# Altium PCB AMS.PcbDoc (part 3 of 3)
Units mm, origin at the board's own origin, x right, y up, seen from the top; angles counter-clockwise.
Board outline 150 x 60 mm, 4 copper layers (Top Layer, Layer 1, Layer 2, Bottom Layer), stack 0.603 mm thick; 208 components, 140 nets, 599 pads, 192 vias.
Unrouted connection lines stored in the file: 272.
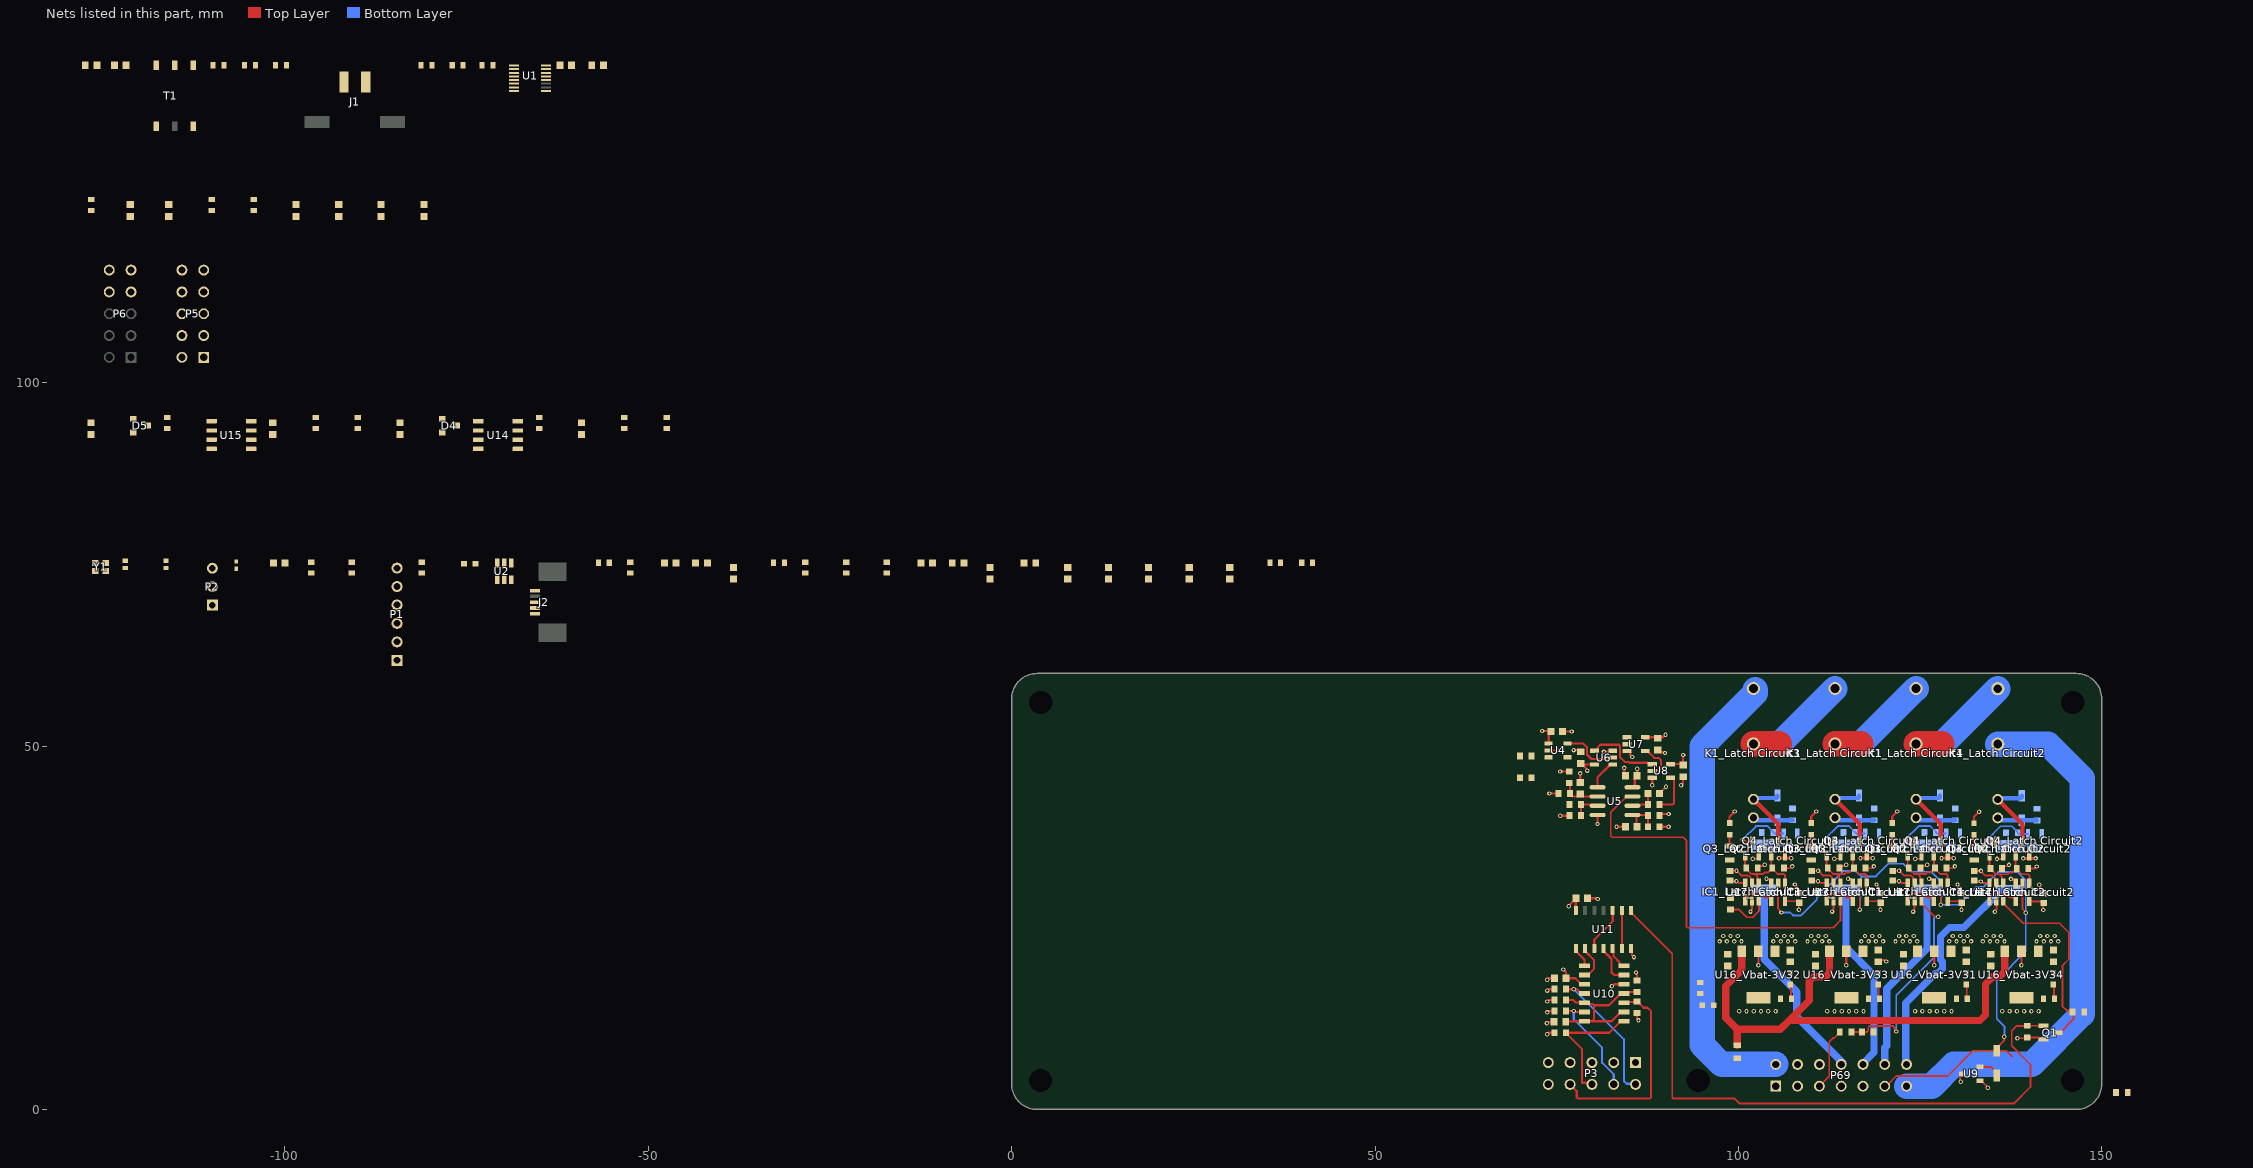
[diagram p3: the nets of this part, all layers, seen from the top]

## Via types
v1: diameter 0.6, hole 0.3, Top Layer to Bottom Layer, 192 vias

## Nets (pads, with @x,y where several pads share a name; then routed paths per layer and width w, separated by ;. In a path a pad name is that pad's centre, name@x,y a point inside that pad or via, vN(x,y) a via of type N, cw(c..) or ccw(c..) an arc to the next point about the centre after c; other vN are vias at no path point) (continued)
NetC28_2: (continued)
  Top Layer w0.3: C28.2@76.25,12.05 76.295,12.095 77.378,12.095 77.423,12.14 79.809,12.14 ; R37.1@76.3,15.05 77.29,15.05 77.625,14.715 78.803,14.715 79.013,14.505 79.974,14.505 80.15,14.329 ; U10.9@84.262,13.41 83.825,13.41 82.665,12.25 82.65,12.25 82.54,12.14 79.809,12.14 ; R38.2@86.05,16.15 84.9,16.15 84.7,15.95 U10.11@84.262,15.95 83.825,15.95 82.204,14.329 80.15,14.329 ; 79.809,12.14 80.15,12.481 80.15,14.329
NetC31_2: C31.2 R39.2
NetC33_2: C33.2 R40.2
NetC39_2: C39.2 R45.2 R46.2
NetC40_2: C40.2 R47.2 R48.2
NetD1_1: D1.1 R18.2
NetD2_1: D2.1 U9.2 | length 3
  Top Layer w0.254: U9.2@133.25,5.855 134.745,5.855 135.55,5.05 D2.1@135.55,4.675
NetD3_1: D3.1 R42.2
NetD6_Vbat-3V31_1: D6_Vbat-3V31.1 R50_Vbat-3V31.2 | length 2
  Top Layer w0.254: D6_Vbat-3V31.1@131.35,17.175 131.425,17.1 131.425,15.325 R50_Vbat-3V31.2@131.5,15.25
NetD6_Vbat-3V32_1: D6_Vbat-3V32.1 R50_Vbat-3V32.2 | length 2
  Top Layer w0.254: D6_Vbat-3V32.1@107.15,17.175 107.225,17.1 107.225,15.325 R50_Vbat-3V32.2@107.3,15.25
NetD6_Vbat-3V33_1: D6_Vbat-3V33.1 R50_Vbat-3V33.2 | length 2
  Top Layer w0.254: D6_Vbat-3V33.1@119.25,17.175 119.325,17.1 119.325,15.325 R50_Vbat-3V33.2@119.4,15.25
NetD6_Vbat-3V34_1: D6_Vbat-3V34.1 R50_Vbat-3V34.2 | length 2
  Top Layer w0.254: D6_Vbat-3V34.1@143.35,17.175 143.425,17.1 143.425,15.325 R50_Vbat-3V34.2@143.5,15.25
"NetD7_Latch Circuit1_1": "D7_Latch Circuit1.1" "K1_Latch Circuit1.A2" "Q2_Latch Circuit1.3" | length 10.9
  Top Layer w0.6: 113.3,42.679 116.7,39.279 116.7,36.849
  Bottom Layer w0.6: 113.3,42.679 113.472,42.851 116.475,42.851 116.6,42.976 116.6,43.199
"NetD7_Latch Circuit1_2": "D7_Latch Circuit1.2" "K1_Latch Circuit1.A1" "R52_Latch Circuit1.1" | length 5.5
  Bottom Layer w0.6: 113.3,40.139 113.544,40.139 113.884,39.799 116.6,39.799 118.7,39.799
"NetD7_Latch Circuit2_1": "D7_Latch Circuit2.1" "K1_Latch Circuit2.A2" "Q2_Latch Circuit2.3" | length 10.9
  Top Layer w0.6: 135.7,42.655 139.1,39.255 139.1,36.825
  Bottom Layer w0.6: 135.7,42.655 135.872,42.827 138.875,42.827 139,42.952 139,43.175
"NetD7_Latch Circuit2_2": "D7_Latch Circuit2.2" "K1_Latch Circuit2.A1" "R52_Latch Circuit2.1" | length 5.5
  Bottom Layer w0.6: 135.7,40.115 135.944,40.115 136.284,39.775 139,39.775 141.1,39.775
"NetD7_Latch Circuit3_1": "D7_Latch Circuit3.1" "K1_Latch Circuit3.A2" "Q2_Latch Circuit3.3" | length 10.9
  Top Layer w0.6: 102.075,42.68 105.475,39.28 105.475,36.85
  Bottom Layer w0.6: 102.075,42.68 102.247,42.852 105.25,42.852 105.375,42.977 105.375,43.2
"NetD7_Latch Circuit3_2": "D7_Latch Circuit3.2" "K1_Latch Circuit3.A1" "R52_Latch Circuit3.1" | length 5.5
  Bottom Layer w0.6: 102.075,40.14 102.319,40.14 102.659,39.8 105.375,39.8 107.475,39.8
"NetD7_Latch Circuit4_1": "D7_Latch Circuit4.1" "K1_Latch Circuit4.A2" "Q2_Latch Circuit4.3" | length 10.9
  Top Layer w0.6: 124.45,42.68 127.85,39.28 127.85,36.85
  Bottom Layer w0.6: 124.45,42.68 124.622,42.852 127.625,42.852 127.75,42.977 127.75,43.2
"NetD7_Latch Circuit4_2": "D7_Latch Circuit4.2" "K1_Latch Circuit4.A1" "R52_Latch Circuit4.1" | length 5.5
  Bottom Layer w0.6: 124.45,40.14 124.694,40.14 125.034,39.8 127.75,39.8 129.85,39.8
"NetD8_Latch Circuit1_1": "D8_Latch Circuit1.1" "Q4_Latch Circuit1.3" "R56_Latch Circuit1.1" | length 5.8
  Top Layer w0.3: 110.025,39.399 110.025,40.299 v1(110.725,40.999)
  Bottom Layer w0.5: 114.8,36.399 118.35,36.399 118.4,36.349 118.4,36.049
"NetD8_Latch Circuit1_2": "D8_Latch Circuit1.2" "R55_Latch Circuit1.1" | length 1.6
  Top Layer w0.3: 110.025,37.799 110.025,36.249 110.05,36.224
"NetD8_Latch Circuit2_1": "D8_Latch Circuit2.1" "Q4_Latch Circuit2.3" "R56_Latch Circuit2.1" | length 5.8
  Top Layer w0.3: 132.425,39.375 132.425,40.275 v1(133.125,40.975)
  Bottom Layer w0.5: 137.2,36.375 140.75,36.375 140.8,36.325 140.8,36.025
"NetD8_Latch Circuit2_2": "D8_Latch Circuit2.2" "R55_Latch Circuit2.1" | length 1.6
  Top Layer w0.3: 132.425,37.775 132.425,36.225 132.45,36.2
"NetD8_Latch Circuit3_1": "D8_Latch Circuit3.1" "Q4_Latch Circuit3.3" "R56_Latch Circuit3.1" | length 5.8
  Top Layer w0.3: 98.8,39.4 98.8,40.3 v1(99.5,41)
  Bottom Layer w0.5: 103.575,36.4 107.125,36.4 107.175,36.35 107.175,36.05
"NetD8_Latch Circuit3_2": "D8_Latch Circuit3.2" "R55_Latch Circuit3.1" | length 1.6
  Top Layer w0.3: 98.8,37.8 98.8,36.25 98.825,36.225
"NetD8_Latch Circuit4_1": "D8_Latch Circuit4.1" "Q4_Latch Circuit4.3" "R56_Latch Circuit4.1" | length 5.8
  Top Layer w0.3: 121.175,39.4 121.175,40.3 v1(121.875,41)
  Bottom Layer w0.5: 125.95,36.4 129.5,36.4 129.55,36.35 129.55,36.05
"NetD8_Latch Circuit4_2": "D8_Latch Circuit4.2" "R55_Latch Circuit4.1" | length 1.6
  Top Layer w0.3: 121.175,37.8 121.175,36.25 121.2,36.225
"NetIC1_Latch Circuit1_1": "IC1_Latch Circuit1.1" "U17_Latch Circuit1.4" | length 4.9
  Top Layer w0.254: 112.15,28.674 112.15,28.974 112.473,29.297 112.473,29.409 112.763,29.699 114.387,29.699 114.939,29.147 115.577,29.147 115.75,28.974 115.75,28.649
"NetIC1_Latch Circuit2_1": "IC1_Latch Circuit2.1" "U17_Latch Circuit2.4" | length 4.9
  Top Layer w0.254: 134.55,28.65 134.55,28.95 134.873,29.273 134.873,29.385 135.163,29.675 136.787,29.675 137.339,29.123 137.977,29.123 138.15,28.95 138.15,28.625
"NetIC1_Latch Circuit3_1": "IC1_Latch Circuit3.1" "U17_Latch Circuit3.4" | length 4.9
  Top Layer w0.254: 100.925,28.675 100.925,28.975 101.248,29.298 101.248,29.41 101.538,29.7 103.162,29.7 103.714,29.148 104.352,29.148 104.525,28.975 104.525,28.65
"NetIC1_Latch Circuit4_1": "IC1_Latch Circuit4.1" "U17_Latch Circuit4.4" | length 4.9
  Top Layer w0.254: 123.3,28.675 123.3,28.975 123.623,29.298 123.623,29.41 123.913,29.7 125.537,29.7 126.089,29.148 126.727,29.148 126.9,28.975 126.9,28.65
NetJ3_4: R40.1
"NetK1_Latch Circuit1_11": "K1_Latch Circuit1.11" "K1_Latch Circuit3.14" | length 13.5
  Top Layer w3.5: 102.075,50.3 105.625,50.3
  Bottom Layer w3.5: 106.273,50.892 113.3,57.919
"NetK1_Latch Circuit2_11": "K1_Latch Circuit2.11" "K1_Latch Circuit4.14" | length 13.5
  Top Layer w3.5: 124.45,50.3 128,50.3
  Bottom Layer w3.5: 128.673,50.868 135.7,57.895
"NetK1_Latch Circuit4_11": "K1_Latch Circuit1.14" "K1_Latch Circuit4.11" | length 13.5
  Top Layer w3.5: 113.3,50.299 116.85,50.299
  Bottom Layer w3.5: 117.423,50.893 124.45,57.92
NetP3_2: P3.2 R35.1 U10.4 | length 20.1
  Top Layer w0.3: R35.1@76.3,16.55 v1(77.347,16.55) 77.8,16.55 78.4,15.95 U10.4@78.838,15.95
  Bottom Layer w0.3: v1(77.347,16.55) 84.25,9.647 84.25,3.926 84.65,3.526 85.774,3.526 P3.2@85.85,3.45
NetP3_4: P3.4 R36.1 U10.6 | length 15
  Top Layer w0.3: R36.1@76.3,13.55 77.318,13.55 77.458,13.41 U10.6@78.838,13.41
  Bottom Layer w0.3: v1(77.347,13.55) 77.347,12.403 81.25,8.5 81.25,6.424 82.85,4.824 P3.4@82.85,3.45
NetP3_6: P3.6 R34.1 U10.8 | length 17.8
  Top Layer w0.3: P3.6@79.85,3.45 79.624,3.676 78.5,3.676 78.5,8.275 76.3,10.475 R34.1@76.3,10.55 82.235,10.55 83.825,12.14 U10.8@84.262,12.14
NetP3_8: P3.8 R33.1 U10.10 | length 28.7
  Top Layer w0.3: P3.8@76.85,3.45 76.85,3.4 77.75,2.5 77.75,1.676 77.926,1.5 87.824,1.5 88,1.676 88,13.5 87.5,14 86.975,14 86.125,14.85 R33.1@86.05,14.85 85.965,14.765 84.347,14.765 U10.10@84.262,14.68
NetP5_1: P5.1 P5.3
"NetQ3_Latch Circuit1_3": "Q3_Latch Circuit1.3" "Q4_Latch Circuit1.1" "R54_Latch Circuit1.1" | length 8.3
  Top Layer w0.254: v1(111.825,37.149) 111.919,37.149 112.219,36.849 113.1,36.849
  Bottom Layer w0.254: v1(111.825,37.149) 113.675,38.999 115.25,38.999 115.43,38.819 115.43,38.794 116.05,38.174 116.05,38.099 116.2,37.949 117.45,37.949
"NetQ3_Latch Circuit2_3": "Q3_Latch Circuit2.3" "Q4_Latch Circuit2.1" "R54_Latch Circuit2.1" | length 8.3
  Top Layer w0.254: v1(134.225,37.125) 134.319,37.125 134.619,36.825 135.5,36.825
  Bottom Layer w0.254: v1(134.225,37.125) 136.075,38.975 137.65,38.975 137.83,38.795 137.83,38.77 138.45,38.15 138.45,38.075 138.6,37.925 139.85,37.925
"NetQ3_Latch Circuit3_3": "Q3_Latch Circuit3.3" "Q4_Latch Circuit3.1" "R54_Latch Circuit3.1" | length 8.3
  Top Layer w0.254: v1(100.6,37.15) 100.694,37.15 100.994,36.85 101.875,36.85
  Bottom Layer w0.254: v1(100.6,37.15) 102.45,39 104.025,39 104.205,38.82 104.205,38.795 104.825,38.175 104.825,38.1 104.975,37.95 106.225,37.95
"NetQ3_Latch Circuit4_3": "Q3_Latch Circuit4.3" "Q4_Latch Circuit4.1" "R54_Latch Circuit4.1" | length 8.3
  Top Layer w0.254: v1(122.975,37.15) 123.069,37.15 123.369,36.85 124.25,36.85
  Bottom Layer w0.254: v1(122.975,37.15) 124.825,39 126.4,39 126.58,38.82 126.58,38.795 127.2,38.175 127.2,38.1 127.35,37.95 128.6,37.95
NetR1_2: R1.2 T1.6
NetR2_1: R2.1 T1.4
NetR3_1: R3.1 R4.2 U1.15
NetR3_2: R3.2 U1.16
NetR5_1: R5.1 R6.2 U1.1
NetR21_2: R21.2 R24.1 U5.3 | length 3.9
  Top Layer w0.3: R21.2@78.35,40.425 R24.1@78.35,41.95 79.584,41.95 79.744,41.79 U5.3@80.625,41.79
NetR25_2: R25.2 U8.4 | length 6
  Top Layer w0.3: R25.2@89.15,41.95 90.974,41.95 91.15,42.126 91.15,43.788 91.125,43.813 91.125,45.475 90.975,45.625 U8.4@90.65,45.625
NetR28_1: "IC1_Latch Circuit4.3" R28.1 R30.2 | length 29.1
  Top Layer w0.254: R28.1@115.55,10.675 R30.2@117,10.675 117.724,10.675 117.873,10.824 117.873,11.285 118.065,11.477 121.298,11.477 121.478,11.297 121.478,11.066 121.725,10.819 v1(121.725,10.725) ; 125.2,28.675 125.2,28.375 126.984,26.591 127.434,26.591 v1(127.5,26.525)
  Bottom Layer w0.254: v1(121.725,10.725) 121.725,15.725 126.9,20.9 126.9,26.325 127.1,26.525 v1(127.5,26.525)
NetU4_5: U4.5 U6.2 | length 7.7
  Top Layer w0.3: U4.5@76.5,50.35 78.67,50.35 79.175,49.845 79.175,48.851 79.801,48.225 82.074,48.225 82.124,48.275 82.55,48.275 U6.2@82.7,48.425
NetU5_1: U5.1 U6.1 | length 4.2
  Top Layer w0.3: U5.1@80.625,44.33 80.625,45.7 82.4,47.475 U6.1@82.7,47.475
NetU6_4: U6.4 U8.1 | length 10.4
  Top Layer w0.3: U6.4@80.2,49.375 80.5,49.375 80.65,49.525 80.65,49.825 81,50.175 83.549,50.175 83.725,49.999 83.725,48.475 84.375,47.825 84.885,47.825 85.01,47.7 87.499,47.7 87.524,47.675 87.675,47.675 87.825,47.525 U8.1@88.15,47.525
NetU7_4: U7.4 U8.2 | length 5.3
  Top Layer w0.3: U7.4@87.175,49.325 87.475,49.325 88.425,48.375 89.025,48.375 89.35,48.05 89.35,46.751 89.174,46.575 U8.2@88.15,46.575
NetU10_1: U10.1 U11.1 | length 2.9
  Top Layer w0.3: U11.1@77.63,22.15 77.63,21.8 78.838,20.592 U10.1@78.838,19.76
NetU10_2: U10.2 U11.2 | length 5
  Top Layer w0.3: U10.2@78.838,18.49 79.275,18.49 80.15,19.365 80.15,20.55 78.9,21.8 U11.2@78.9,22.15
NetU10_13: U10.13 U11.4 | length 5.6
  Top Layer w0.3: U11.4@81.44,22.15 81.44,21.8 82.55,20.69 82.55,18.85 82.91,18.49 U10.13@84.262,18.49
NetU10_14: U10.14 U11.5 | length 3.3
  Top Layer w0.3: U11.5@82.71,22.15 82.835,22.025 82.835,21.075 83.649,20.261 83.649,19.935 83.825,19.76 U10.14@84.262,19.76
NetU11_3: U11.3 U11.10 | length 6.3
  Top Layer w0.3: U11.3@80.17,22.15 80.17,23.37 82.71,25.91 U11.10@82.71,27.4
NetU11_6: U11.6 U11.9 | length 5.2
  Top Layer w0.3: U11.6@83.98,22.15 U11.9@83.98,27.4
NRST: C9.2 P1.5 R16.1
OSC_IN: C12.2 Y1.1
OSC_OUT: R17.2
PDOC-In: Q1.1 R31.2 U11.8 | length 92.1
  Top Layer w0.254: U11.8@85.25,27.4 85.25,27.05 90.9,21.4 90.9,1.649 91.049,1.5 99.5,1.5 100.2,0.8 137.9,0.8 140.2,3.1 140.2,6.162 137.623,8.739 137.623,10.823 138.3,11.5 139.737,11.5 139.762,11.525 Q1.1@141.975,11.525
PDOC-MCU: "IC1_Latch Circuit2.4" "Q2_Latch Circuit2.1" "Q3_Latch Circuit2.1" "R51_Latch Circuit2.2" "R53_Latch Circuit2.2" "U17_Latch Circuit2.1" | length 12.6
  Top Layer w0.254: 134.55,34.925 134.55,33.325 134.7,33.175 134.7,33.1 135.427,32.373 135.9,32.373 ; 136.45,31.15 136.277,31.323 136.277,31.996 135.9,32.373 ; 138.15,34.925 138.15,33.325 138.3,33.175 138.3,33.1 ; 140.05,31.125 140.05,32.223 139.9,32.373 139.027,32.373 138.3,33.1 ; 135.9,32.373 137.049,32.373 137.276,32.6 137.725,32.6 137.952,32.827 138.027,32.827 138.3,33.1
PDOC-Out: "R56_Latch Circuit2.2" P69.14 | length 32.1
  Bottom Layer w1: P69.14@123.15,6.2 123.054,6.296 123.054,6.649 123.025,6.679 123.025,14.65 127.075,18.7 127.426,18.7 128.1,19.374 128.1,20.326 127.825,20.601 127.825,23.801 129.047,25.023 131.023,25.023 136.175,30.175 137.2,30.175
PDOC-Ready: "IC1_Latch Circuit2.3" Q1.3 R32.1 | length 27.3
  Top Layer w0.254: 136.45,28.65 136.45,28.35 139.188,25.612 144.189,25.612 145.5,24.301 145.5,20.7 144.6,19.8 144.6,14.2 145.175,13.625 145.775,13.625 R32.1@146,13.4 146.1,13.3 146.1,12.4 144.275,10.575 Q1.3@143.875,10.575
PRTA_N: J1.2 T1.3
PRTA_P: J1.1 T1.1
RESET: "U17_Latch Circuit1.2" "U17_Latch Circuit2.2" "U17_Latch Circuit3.2" "U17_Latch Circuit4.2" D2.2 P69.11 R?.1 | length 109.7
  Top Layer w0.254: 105.475,31.15 105.475,27.613 105.925,27.163 v1(105.925,27.1) ; v1@116.7,27.612 116.7,31.149 ; P69.11@120.15,3.2 120.35,3.2 121.75,4.6 128.8,4.6 132.275,8.075 D2.2@135.55,8.075 ; v1(127.85,28.175) 127.85,31.15 ; v1(136.6,10) 136.534,9.934 136.534,9.434 135.55,8.45 D2.2@135.55,8.075 ; 137.7,7.325 137.625,7.325 136.875,8.075 D2.2@135.55,8.075 ; 139.1,31.125 139.1,27.588 139.55,27.138 v1(139.55,27.075)
  Bottom Layer w0.254: v1(105.925,27.1) 107.132,27.1 107.534,26.698 108.647,26.698 110.781,28.832 110.781,29.117 114.464,32.8 116.175,32.8 116.9,32.075 ; v1(116.7,27.5) 116.7,29.161 116.9,29.361 116.9,32.075 ; v1(136.6,10) 136.6,11.442 135.546,12.496 135.546,17.737 139.55,21.741 v1(139.55,27.075) 139.55,31.525 138.4,32.675 135.749,32.675 133.672,30.598 132.724,30.598 130.301,28.175 v1(127.85,28.175) 127.85,29.163 128.027,29.34 128.027,31.198 126.525,32.7 123.775,32.7 122.675,33.8 120.65,33.8 118.925,32.075 116.9,32.075
Safe-IN: "K1_Latch Circuit3.11" P69.2 | length 63.1
  Bottom Layer w3.5: 102.3,57.75 102.3,57.27 95.023,49.993 95.023,8.872 97.695,6.2 P69.2@105.15,6.2
Safe-OUT: "K1_Latch Circuit2.14" P69.13 | length 74.3
  Bottom Layer w3.5: P69.13@123.15,3.2 126.606,3.2 129.606,6.2 140.375,6.2 147.3,13.125 147.3,45.6 142.625,50.275 135.7,50.275
SafeADC1: C7.2 R11.1 R12.2
SafeADC2: C8.2 R13.1 R14.2
SafeADC3: C6.2 R9.1 R10.2
SafeADC4: C5.2 R7.1 R8.2
SafeIN1: P6.7 R11.2
SafeIN2: P6.8 R13.2
SafeIN3: P6.9 R9.2
SafeIN4: P6.10 R7.2
SWCLK: P1.2
SWDIO: P1.4
SWO: P1.6
UART_RX: P2.2
UART_TX: P2.3
USB_D_N: J2.2 U2.3 U2.4
USB_D_P: J2.3 U2.1 U2.6
User-LED: D1.2
V-Bat: F1.1 P69.1 P69.3
Vbat: C32.2
pads on no net: J1.P1 J1.P2 J2.4 J2.6 J2.7 MH1.1 MH2.1 MH3.1 MH4.1 MH5.1 MH6.1 P6.1 P6.2 P6.3 P6.4 P6.5 P6.6 T1. T1.2 U1. U1.10 U1.11 U2. U11.11 U11.12 U11.13

## Polygon pours and split planes (outlines as drawn)
3V3-BMS on Top Layer "3V3-BMS_L01_P011" (solid, pour order 11): 103.95,24.425 103.95,20.25 103.975,20.225 106.2,20.225 106.2,21.175 108.45,21.175 108.45,24.425
no net on Top Layer "NONET_L01_P024" (solid, pour order 24): 125.75,24.425 125.75,20.25 125.725,20.225 123.5,20.225 123.5,21.175 121.25,21.175 121.25,24.425
3V3-BSPD on Top Layer "3V3-BSPD_L01_P012" (solid, pour order 12): 116.05,24.425 116.05,20.25 116.075,20.225 118.3,20.225 118.3,21.175 120.55,21.175 120.55,24.425
+12 on Top Layer "+12_L01_P016" (solid, pour order 16): 113.65,24.425 113.65,20.25 113.625,20.225 111.4,20.225 111.4,21.175 109.15,21.175 109.15,24.425
GND on Top Layer "GND_L01_P020" (solid, pour order 20): 118.05,13.15 111.65,13.15 111.65,17.15 118.05,17.15
V-Bat on Top Layer "V-BAT_L01_P026" (solid, pour order 26): 109.5,4.75 109.5,1.25 101.5,1.25 98.5,6.5 98.5,8 100.75,8 103,5.75 103,4.75
+12 on Top Layer "+12_L01_P018" (solid, pour order 18): 137.75,24.425 137.75,20.25 137.725,20.225 135.5,20.225 135.5,21.175 133.25,21.175 133.25,24.425
3V3-PDOC on Top Layer "3V3-PDOC_L01_P014" (solid, pour order 14): 140.15,24.425 140.15,20.25 140.175,20.225 142.4,20.225 142.4,21.175 144.65,21.175 144.65,24.425
GND on Top Layer "GND_L01_P022" (solid, pour order 22): 142.15,13.15 135.75,13.15 135.75,17.15 142.15,17.15
no net on Top Layer "NONET_L01_P025" (solid, pour order 25): 137.75,24.425 137.75,20.25 137.725,20.225 135.5,20.225 135.5,21.175 133.25,21.175 133.25,24.425
+12 on Top Layer "+12_L01_P017" (solid, pour order 17): 125.75,24.425 125.75,20.25 125.725,20.225 123.5,20.225 123.5,21.175 121.25,21.175 121.25,24.425
3V3-IMD on Top Layer "3V3-IMD_L01_P013" (solid, pour order 13): 128.15,24.425 128.15,20.25 128.175,20.225 130.4,20.225 130.4,21.175 132.65,21.175 132.65,24.425
GND on Top Layer "GND_L01_P021" (solid, pour order 21): 130.15,13.15 123.75,13.15 123.75,17.15 130.15,17.15
no net on Top Layer "NONET_L01_P023" (solid, pour order 23): 101.55,24.425 101.55,20.25 101.525,20.225 99.3,20.225 99.3,21.175 97.05,21.175 97.05,24.425
GND on Top Layer "GND_L01_P019" (solid, pour order 19): 105.95,13.15 99.55,13.15 99.55,17.15 105.95,17.15
+12 on Top Layer "+12_L01_P015" (solid, pour order 15): 101.55,24.425 101.55,20.25 101.525,20.225 99.3,20.225 99.3,21.175 97.05,21.175 97.05,24.425
3V3-BSPD on Layer 1 "3V3-BSPD_L02_P028" (solid, pour order 28): 93.5,53 93.5,38 69,38 69,53
3V3-PDOC on Layer 1 "3V3-PDOC_L02_P027" (solid, pour order 27): 70.5,29.5 70.5,9 89.5,9 89.5,29.5

## Silkscreen, mask and mechanical layers (free items; w line width, h text height)
Top Overlay:
  text "IMD" at 111.2,43.337 h4.5 r90
  text "AMS" at 100.125,42.475 h4.5 r90
  text "BSPD" at 122.425,41.507 h4.5 r90
  text "PDOC" at 133.25,41.155 h4.5 r90
  text "12V" at 91.925,10.475 h4
Board Shape:
  the board outline again, w0.1

## Text inside footprints (layer, text, board x,y; h text height)
J2: Mechanical 1 "PCB EDGE" at -59.481,61.163 h0.3 r90